# EAGLE board Periféricos USAL(3ºIng-Infor)-Sesión 3 B3b  (EAGLE 9.7.0)

Size 148.5 x 59.69 mm. Coordinates in mm from the lower left corner, seen from the top.
Outline: 0,0 148.5,0 148.5,59.69 0,59.69 0,0
Copper layers (1*16): Top 0.035mm / dielectric 1.5mm / Bottom 0.035mm
Design rules "default": minimum track width 6mil, minimum drill 0.35mm, track to track 6mil, track to pad 6mil, pad to pad 6mil, via to via 6mil, smd to smd 6mil, copper to edge 40mil, drill to drill 6mil, minimum pad ring 10mil, minimum via ring 8mil, stop-mask expansion 4mil, vias tented up to drill 0mil, thermal gap 10mil

## Footprints (pad centres in the part's own frame; a part is rotated, then mirrored left to right if it is on the bottom)
MOTOR = drill 1.118 pad 3.15 octagon: + 2.54,0; - -2.54,0
RESAD1016W63L850D250B = drill 0.83 pad 1.43: 1 -5.08,0; 2 5.08,0
TO92 = drill 0.813 octagon: 1 -1.27,0; 2 0,1.905; 3 1.27,0
ARDUINO-UNO-R3-SHIELD = drill 1.016 pad 1.88: 3.3V 24.13,-2.54; 5V 24.13,0; A0 24.13,12.7; A1 24.13,15.24; A2 24.13,17.78; A3 24.13,20.32; A4 24.13,22.86; A5 24.13,25.4; AREF -24.13,-13.97; D2 -24.13,20.32; D3 -24.13,17.78; D4 -24.13,15.24; D5 -24.13,12.7; D6 -24.13,10.16; D7 -24.13,7.62; D8 -24.13,3.81; D9 -24.13,1.27; D10 -24.13,-1.27; D11 -24.13,-3.81; D12 -24.13,-6.35; D13 -24.13,-8.89; GND@0 24.13,2.54; GND@1 24.13,5.08; GND@2 -24.13,-11.43; IOREF 24.13,-7.62; NC 24.13,-10.16; RES 24.13,-5.08; RX -24.13,25.4; SCL -24.13,-19.05; SDA -24.13,-16.51; TX -24.13,22.86; VIN 24.13,7.62
DIODE-AXIAL = drill 1: 1 -5.08,0; 2 5.08,0

## Placement (x,y rotation side)
M1  MOTOR_HDR  [MOTOR]  136.96,42.97 0 top
R1  1k  [RESAD1016W63L850D250B]  111.56,35.35 0 top
T1  NPN  [TO92]  106.48,40.43 0 top
U1  ARDUINO-UNO-R3-SHIELD  [ARDUINO-UNO-R3-SHIELD]  47.88,29.84 270 top
U2  ZENER_DIODE-AXIAL  [DIODE-AXIAL]  139.5,20.11 0 top

## Library data of the parts
M1 R1 U1 U2 = Tinkercad
T1 = Tinkercad; CATEGORY: Transistor; SUB-CATEGORY: BJT; TYPE: NPN

## Nets
M1_-: M1.- T1.1 U2.1
T1_B: R1.1 T1.2
U1_5V: M1.+ U1.5V U2.2
U1_D9: R1.2 U1.D9
U1_GND: T1.3 U1.GND@0 U1.GND@1 U1.GND@2

## Tracks (layer width: path | path; a pad name or v marks a point on that pad's centre or on a via)
M1_-  (2 unrouted)
T1_B  (1 unrouted)
U1_5V  (2 unrouted)
U1_D9  (1 unrouted)
U1_GND  (3 unrouted)